# Altium PCB Seguidordelinea.PcbDoc
Units mm, origin at the board's own origin, x right, y up, seen from the top; angles counter-clockwise.
Board outline 150 x 60 mm, 2 copper layers (Top Layer, Bottom Layer); 38 components, 51 nets, 177 pads, 10 vias.
Unrouted connection lines stored in the file: 8.
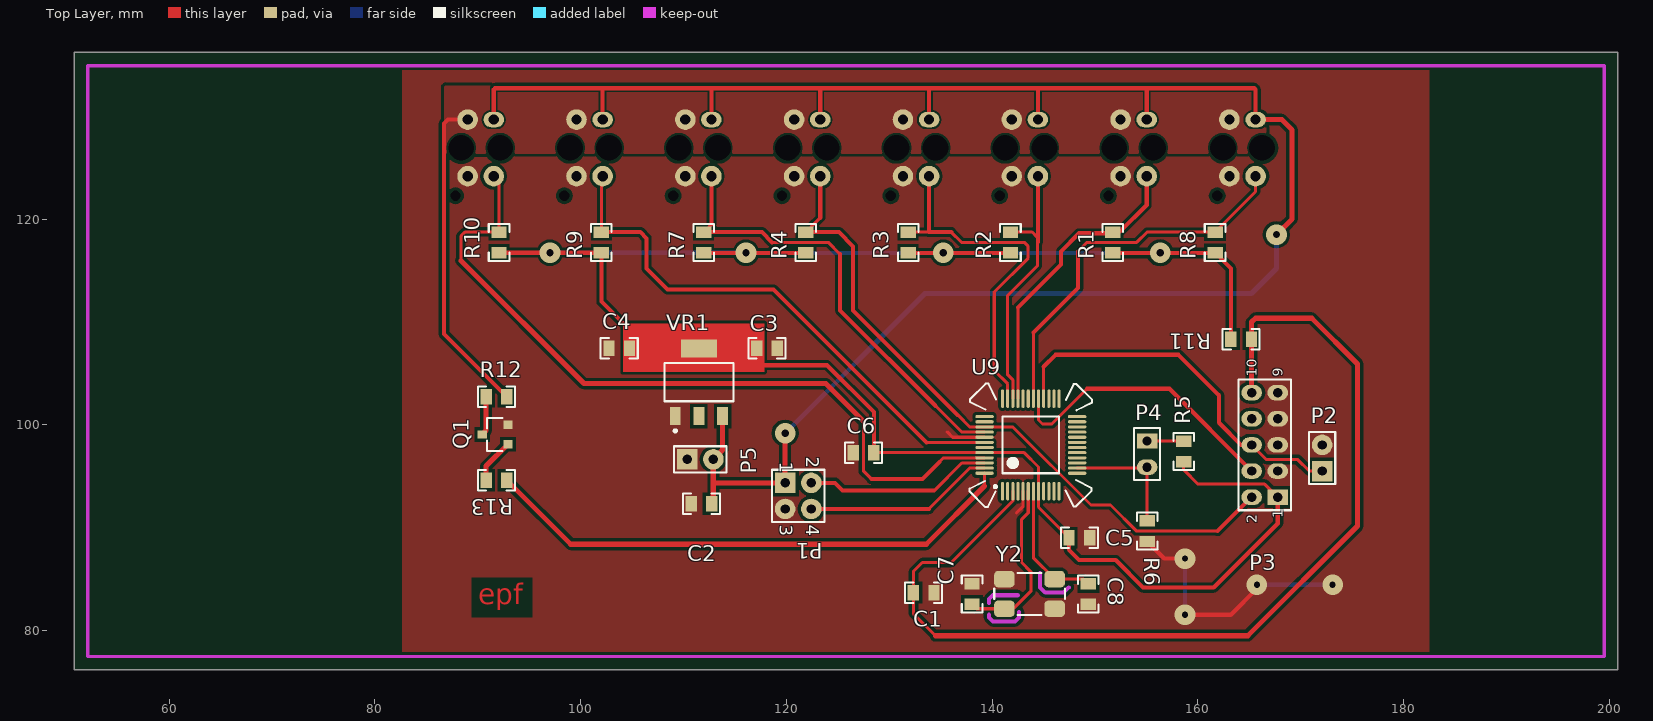
[diagram p0: Top Layer view]
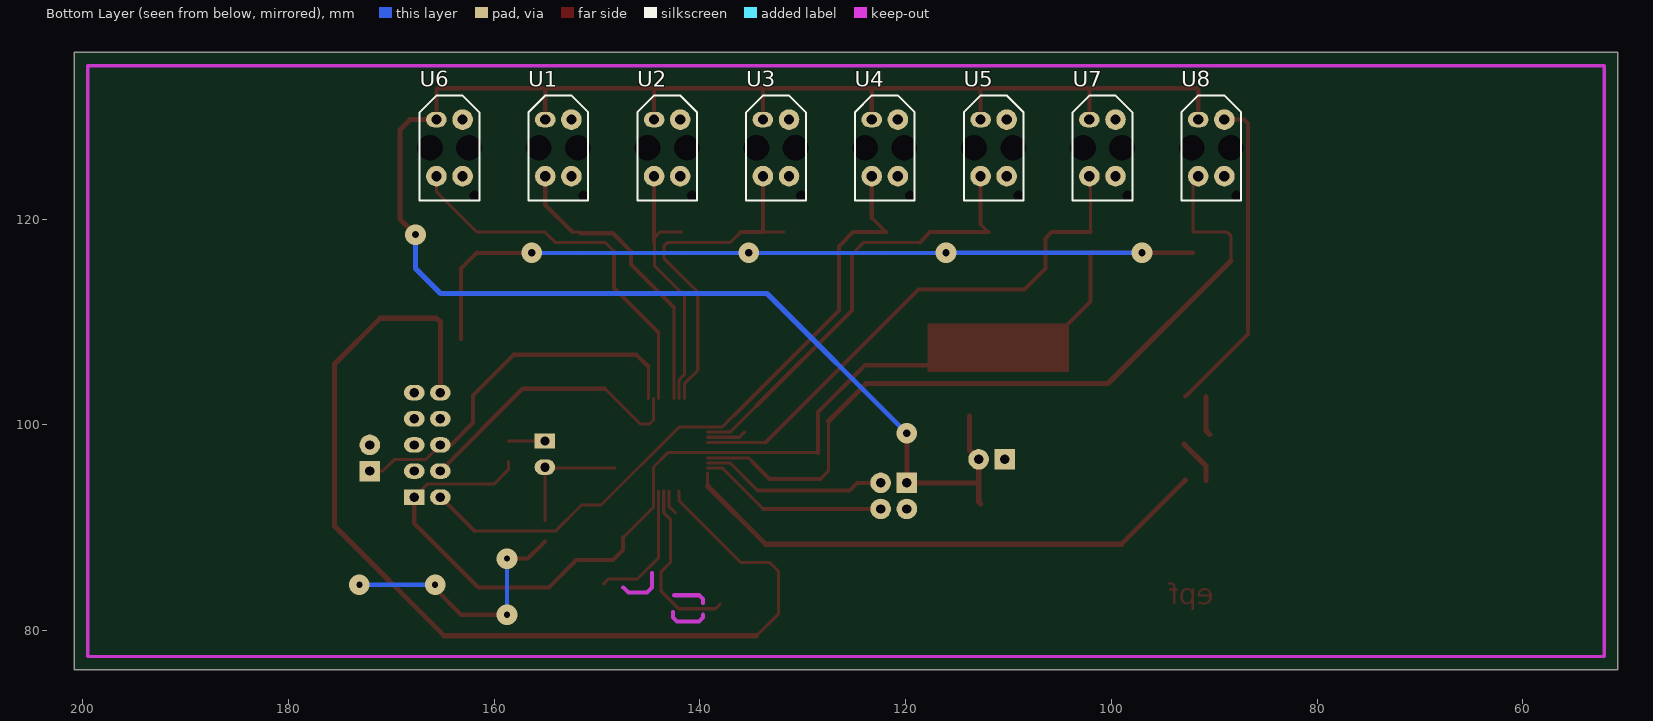
[diagram p1: Bottom Layer view, seen from below]

## Layer stack, top to bottom
Top Layer: signal copper 0.0356
Dielectric: dielectric 0.32, FR-4, Dk 4.8
Bottom Layer: signal copper 0.0356

## Board outline
50.8,76.2 200.8,76.2 200.8,136.2 50.8,136.2

## Design rules (kind name [scope] priority, off if disabled: settings)
Clearance Clearance_1 [InNamedPolygon('TOPGND')] p1: gap=0.3
Clearance [All] p2: gap=0.2
PolygonConnect [All] p1: connectstyle=Direct reliefconductorwidth=0.254 reliefentries=4 polygonreliefangle="90 Angle"
RoutingVias [All] p1: holewidth=0.6 width=2 viastyle="Through Hole" minholewidth=0.6 minwidth=1.27 maxholewidth=3 maxwidth=3
SilkscreenOverComponentPads [All] p1: minsilkscreentomaskgap=0.254
SolderMaskExpansion [All] p1: expansion=0.102
Width [All] p1: maxlimit=2 minlimit=0.3 preferedwidth=0.5
27 further rules are at their usual default settings.

## Components (designator, comment, footprint, x,y, rotation, side; value= is the part's Value field where it differs from the comment)
C1 "Capacitor" 0805_CAP 133.35,83.693 r180 top
C2 "Capacitor" 0805_CAP 111.744,92.329 r0 top
C3 "Capacitor" 0805_CAP 118.11,107.442 r180 top
C4 "Capacitor" 0805_CAP 103.759,107.442 r0 top
C5 "Capacitor" 0805_CAP 148.479,89.027 r180 top
C6 "Capacitor" 0805_CAP 127.508,97.282 r0 top
C7 "Capacitor" 0805_CAP 138.049,83.566 r270 top
C8 "Capacitor" 0805_CAP 149.352,83.55 r270 top
P1 "Header 2X2" HDR2X2 119.888,94.361 r270 top
P2 "Header 2" HDR1X2#1 172.085,95.504 r90 top
P3 "Header 5X2" HDR2X5 167.767,92.964 r90 top
P4 "Header 2" HDR1X2#2 155.067,98.425 r270 top
P5 "Header 2" HDR1X2#1 110.363,96.647 r0 top
Q1 "BC847B" SOT23 91.694,99.06 r90 top
R1 "Resistor" 0805_RES 151.729,117.729 r90 top
R2 "Resistor" 0805_RES 141.786,117.729 r90 top
R3 "Resistor" 0805_RES 131.844,117.729 r90 top
R4 "Resistor" 0805_RES 121.902,117.729 r90 top
R5 "Resistor" 0805_RES 158.623,97.409 r90 top
R6 "Resistor" 0805_RES 155.067,89.662 r270 top
R7 "Resistor" 0805_RES 111.96,117.729 r90 top
R8 "Resistor" 0805_RES 161.671,117.729 r90 top
R9 "Resistor" 0805_RES 102.017,117.729 r90 top
R10 "Resistor" 0805_RES 92.075,117.729 r90 top
R11 "Resistor" 0805_RES 164.211,108.331 r180 top
R12 "Resistor" 0805_RES 91.821,102.743 r0 top
R13 "Resistor" 0805_RES 91.821,94.615 r180 top
U1 "TCRT5000" TCRT5000 153.761,126.917 r90 bottom
U2 "TCRT5000" TCRT5000 143.183,126.917 r90 bottom
U3 "TCRT5000" TCRT5000 132.606,126.917 r90 bottom
U4 "TCRT5000" TCRT5000 122.029,126.917 r90 bottom
U5 "TCRT5000" TCRT5000 111.452,126.917 r90 bottom
U6 "TCRT5000" TCRT5000 164.338,126.917 r90 bottom
U7 "TCRT5000" TCRT5000 100.874,126.917 r90 bottom
U8 "TCRT5000" TCRT5000 90.297,126.917 r90 bottom
U9 "LPC1313FBD48/01" TQFP48_LPC1343 143.764,98.044 r0 top
VR1 "AMS1117" "SOT-223 - M3" 111.506,104.138 r0 top
Y2 "SX6035" SX6035 143.637,83.566 r0 top

## Footprints (in the part's own frame and the unit in brackets; to place one, negate y for a bottom-side part, rotate by r counter-clockwise, add the part's x,y. Pads: shape width x height; smd on the part's side, far side on the other; paste and mask are expansions set on the pad)
0805_CAP [mm]
  rect 1.1x1.5 smd: 1(-1,0) 2(1,0)
  silkscreen extent -1.8,-1 1.8,1, body extent -1,-0.62 1,0.63, height 0.78
0805_RES [mm]
  rect 1.1x1.5 smd: 1(-1,0) 2(1,0)
  silkscreen extent -1.8,-1 1.8,1, body extent -1,-0.62 1,0.63, height 0.78
HDR1X2#1 [mm] "Connector; Header; 2 Position"
  rect 2x2 hole 0.9: 1(0,0)
  round 2 hole 0.9: 2(2.54,0)
  silkscreen extent -1.27,-1.27 3.81,1.27
HDR1X2#2 [mm] "Connector; Header; 2 Position"
  rect 1.5x2 hole 0.9: 1(0,0)
  oval 1.5x2 hole 0.9: 2(2.54,0)
  silkscreen extent -1.27,-1.27 3.81,1.27
HDR2X2 [mm] "Connector; Header; 2x2 Position"
  rect 2x2 hole 0.9: 1(0,0)
  round 2 hole 0.9: 2(0,2.54) 3(2.54,0) 4(2.54,2.54)
  silkscreen extent -1.27,-1.27 3.81,3.81
HDR2X5 [mm] "Connector; Header; 5x2 Position"
  rect 1.5x2 hole 0.9: 1(0,0)
  oval 1.5x2 hole 0.9: 2(0,2.54) 3(2.54,0) 4(2.54,2.54) 5(5.08,0) 6(5.08,2.54) 7(7.62,0) 8(7.62,2.54) 9(10.16,0) 10(10.16,2.54)
  silkscreen extent -1.27,-1.27 11.43,3.81, body extent -1.27,-1.27 11.41,3.81, height 8.55
SOT23 [mm]
  rect 0.8x0.9 smd: 1(-0.95,-1.25) 2(0.95,-1.25) 3(0,1.25)
  silkscreen extent -1.6,-0.7 1.6,0.8, body extent -1.5,-1.25 1.5,1.25, height 1.05
"SOT-223 - M3" [mm] "SOT-223/SC-73; 4 Leads; Body 6.7 x 7.3 mm, inc. leads (LxW max)"
  rect 1.05x1.75 smd: 1(-2.3,-3.3) 2(0,-3.3) 3(2.3,-3.3)
  rect 3.5x1.75 smd: 2(0,3.3)
  silkscreen extent -3.35,-4.85 3.35,1.85, body extent -3.32,-3.67 3.38,3.53, height 1.85
SX6035 [mm]
  rrect50% 2x1.6 smd: 1(-2.44,-1.441) 2(2.441,-1.441) 3(2.441,1.441) 4(-2.44,1.441)
  silkscreen extent -3.43,-2.03 3.43,2.03, body extent -3,-1.75 3,1.75, height 1.05
TCRT5000 [mm]
  round 0 hole 1: 0(-4.65,-2.45)
  round 2 hole 2.5: 0(0,-1.9) 0(0,1.9)
  oval 1.5x2 hole 1: 1(2.75,1.27)
  round 2 hole 1: 2(-2.75,1.27) 3(-2.75,-1.27) 4(2.75,-1.27)
  silkscreen extent -5.1,-2.9 5.1,2.9
TQFP48_LPC1343 [mm] "48-Pin Thin Quad Flat Pack 0.5 mm Pitch, IPC Medium Density"
  oval 0.3x1.8 smd: 1(-2.75,-4.5) 2(-2.25,-4.5) 3(-1.75,-4.5) 4(-1.25,-4.5) 5(-0.75,-4.5) 6(-0.25,-4.5) 7(0.25,-4.5) 8(0.75,-4.5) 9(1.25,-4.5) 10(1.75,-4.5) 11(2.25,-4.5) 12(2.75,-4.5) 25(2.75,4.5) 26(2.25,4.5) 27(1.75,4.5) 28(1.25,4.5) 29(0.75,4.5) 30(0.25,4.5) 31(-0.25,4.5) 32(-0.75,4.5) 33(-1.25,4.5) 34(-1.75,4.5) 35(-2.25,4.5) 36(-2.75,4.5)
  oval 1.8x0.3 smd: 13(4.5,-2.75) 14(4.5,-2.25) 15(4.5,-1.75) 16(4.5,-1.25) 17(4.5,-0.75) 18(4.5,-0.25) 19(4.5,0.25) 20(4.5,0.75) 21(4.5,1.25) 22(4.5,1.75) 23(4.5,2.25) 24(4.5,2.75) 37(-4.5,2.75) 38(-4.5,2.25) 39(-4.5,1.75) 40(-4.5,1.25) 41(-4.5,0.75) 42(-4.5,0.25) 43(-4.5,-0.25) 44(-4.5,-0.75) 45(-4.5,-1.25) 46(-4.5,-1.75) 47(-4.5,-2.25) 48(-4.5,-2.75)
  silkscreen extent -5.96,-6.04 5.96,5.96, body extent -4.5,-4.5 4.5,4.5, height 1.64

## Part data
C1 C2 C3 C4 C5 C6 C7 C8: library part Cap
P1: "Header, 2-Pin, Dual row"
P2 P4 P5: "Header, 2-Pin"
P3: "Header, 5-Pin, Dual row"
Q1: "NPN 100MHz"
R1 R2 R3 R4 R5 R6 R7 R8 R9 R10 R11 R12 R13: library part Res
U9: "ARM CortexM3 32K Flash, 8k RAM"
VR1: "Voltage Regulator"
Y2: library part XTAL_SX6035

## Via types
v1: diameter 2, hole 0.711, Top Layer to Bottom Layer, 6 vias
v2: diameter 2, hole 0.6, Top Layer to Bottom Layer, 4 vias

## Nets (pads, with @x,y where several pads share a name; then routed paths per layer and width w, separated by ;. In a path a pad name is that pad's centre, name@x,y a point inside that pad or via, vN(x,y) a via of type N, cw(c..) or ccw(c..) an arc to the next point about the centre after c; other vN are vias at no path point)
3V3: C3.2 C4.2 C5.2 C6.2 P3.1 R1.1 R2.1 R3.1 R4.1 R5.1 R7.1 R8.1 R9.1 R10.1 R11.2 U9.8 U9.44 VR1.2 | length 197.7
  Top Layer w0.3: C6.2 128.52,97.294 U9.44 143.117,97.294 144.514,95.897 U9.8 144.514,91.992 C5.2 ; R5.1 158.623,95.631 160.02,94.234 166.497,94.234 P3.1
  Top Layer w0.4: R10.1 v1(97.028,116.729) R9.1 102.017,111.978 104.648,109.347 ; R7.1 111.976,116.713 v1(116.078,116.713) 121.886,116.713 R4.1 ; 117.094,105.791 123.952,105.791 128.508,101.235 C6.2 ; R3.1 131.86,116.713 v1(135.255,116.713) 141.77,116.713 R2.1 ; C5.2 147.479,87.852 148.463,86.868 152.019,86.868 154.686,84.201 161.544,84.201 167.767,90.424 P3.1 ; R1.1 151.745,116.713 v1(156.337,116.713) 161.655,116.713 R8.1 163.211,115.189 R11.2
  Bottom Layer w0.4: v1(97.028,116.729) 116.062,116.729 v1(116.078,116.713) v1(135.255,116.713) v1(156.337,116.713)
\RESET: C1.2 P3.10 R11.1 U9.3 | length 100.9
  Top Layer w0.3: 134.493,79.502 132.35,81.645 C1.2 132.35,85.741 133.223,86.614 136.041,86.614 142.014,92.587 U9.3
  Top Layer w0.5: 134.493,79.502 164.846,79.502 175.514,90.17 175.514,105.918 171.069,110.363 165.608,110.363 165.227,109.982 P3.10
GND: C1.1 C2.1 C3.1 C4.1 C5.1 C6.1 C7.1 C8.2 P1.3 P2.2 P3.3 P3.5 P3.7 P3.9 P5.1 Q1.2 R6.2 U1.3 U2.3 U3.3 U4.3 U5.3 U6.3 U7.3 U8.3 U9.5 U9.41 VR1.1 Y2.2 Y2.4 | length 31.8
  Top Layer w0.3: 135.636,99.314 136.156,98.794 U9.41 ; 142.367,91.44 143.014,92.087 U9.5
  Top Layer w0.4: R6.2 156.734,86.995 v2(158.75,86.995) ; v2(158.75,81.534) 163.195,81.534 165.735,84.074 v2(165.735,84.455)
  Bottom Layer w0.4: v2(158.75,81.534) v2(158.75,86.995) ; v2(165.735,84.455) v2(173.101,84.455)
LEDON: R12.2 U1.4 U2.4 U3.4 U4.4 U5.4 U6.4 U7.4 U8.4 | length 31.5
  Top Layer w0.4: U8.4 87.122,129.667 86.741,129.286 86.741,108.823 R12.2
LPC13_RXD: P1.2 U9.46 | length 18.3
  Top Layer w0.3: 134.366,93.599 137.061,96.294 U9.46
  Top Layer w0.4: P1.2 124.714,94.361 125.476,93.599 134.366,93.599
LPC13_TXD: P1.4 U9.47 | length 18.5
  Top Layer w0.3: 133.858,91.821 137.831,95.794 U9.47
  Top Layer w0.4: P1.4 133.858,91.821
NetP4_1: P4.1 R5.2 | length 3.6
  Top Layer w0.3: P4.1 155.083,98.409 R5.2
NetQ1_1: Q1.1 R13.2 | length 4.4
  Top Layer w0.5: R13.2 90.821,95.987 Q1.1
NetQ1_3: Q1.3 R12.1 | length 3.8
  Top Layer w0.5: Q1.3 90.821,99.437 R12.1
PIO0_1: U9.4
PIO0_2: U9.10
PIO0_3: P4.2 R6.1 U9.14 | length 12.1
  Top Layer w0.3: U9.14 154.976,95.794 P4.2 R6.1
PIO0_4: U9.15
PIO0_5: U9.16
PIO0_6: U9.22
PIO0_7: U9.23
PIO0_8: U9.27
PIO0_9: P2.1 P3.6 U9.28 | length 36.9
  Top Layer w0.3: U9.28 145.014,105.644 ; 164.211,98.044 P3.6 166.624,96.647 169.672,96.647 170.815,95.504 P2.1
  Top Layer w0.4: 145.014,105.644 146.177,106.807 158.115,106.807 162.052,102.87 162.052,100.203 164.211,98.044
PIO0_10: P3.4 U9.29 | length 27.7
  Top Layer w0.3: U9.29 144.514,100.469 144.907,100.076 145.796,100.076 149.225,103.505
  Top Layer w0.4: 149.225,103.505 157.226,103.505 P3.4
PIO0_11: U9.32
PIO1_0: R1.2 U1.2 U9.33 | length 29
  Top Layer w0.3: U9.33 142.514,111.399 ; R1.2@151.618,118.618 R1.2 R1.2@152.384,118.729
  Top Layer w0.4: 142.514,111.399 146.685,115.57 146.685,116.84 148.463,118.618 R1.2@151.618,118.618 ; R1.2@152.384,118.729 155.031,121.376 U1.2
PIO1_1: R2.2 U2.2 U9.34 | length 26.4
  Top Layer w0.3: R2.2 141.802,118.745 143.891,118.745 144.399,118.237 144.399,117.729 ; U9.34 142.014,104.366 141.478,104.902 141.478,112.522 144.399,115.443 144.399,117.729 ; 144.453,117.783 144.399,117.729
  Top Layer w0.4: 144.453,117.783 U2.2
PIO1_2: R3.2 U3.2 U9.35 | length 34.4
  Top Layer w0.3: R3.2 133.858,118.729 133.876,118.747 ; 136.033,118.729 137.033,117.729 143.129,117.729 143.51,117.348 143.51,116.205 140.208,112.903 140.208,105.283 141.514,103.977 U9.35
  Top Layer w0.4: 133.858,118.729 136.033,118.729 ; 133.876,118.747 U3.2
PIO1_3: P3.2 R4.2 U4.2 U9.39 | length 66.4
  Top Layer w0.3: R4.2 123.299,120.126 ; 136.652,100.965 137.823,99.794 U9.39 142.014,99.794 149.606,92.202 151.511,92.202 154.051,89.662 161.925,89.662
  Top Layer w0.4: R4.2 125.111,118.729 126.492,117.348 126.492,111.125 136.652,100.965 ; 123.299,120.126 U4.2 ; 161.925,89.662 P3.2
PIO1_4: R7.2 U5.2 U9.40 | length 44.3
  Top Layer w0.3: R7.2 112.722,119.491 ; 118.618,117.729 124.079,117.729 125.222,116.586 ; 134.493,101.854 137.053,99.294 U9.40
  Top Layer w0.4: R7.2 117.618,118.729 118.618,117.729 ; 112.722,119.491 U5.2 ; 125.222,116.586 125.222,111.125 134.493,101.854
PIO1_5: R10.2 U8.2 U9.45 | length 75.2
  Top Layer w0.3: 88.392,115.951 88.392,118.364 88.757,118.729 R10.2 92.075,123.659 U8.2 ; 127.481,100.357 127.481,95.531 128.27,94.742 ; 134.874,96.393 135.275,96.794 U9.45
  Top Layer w0.4: 128.27,94.742 133.223,94.742 134.874,96.393
  Top Layer w0.5: 88.392,115.951 100.33,104.013 123.825,104.013 127.481,100.357
PIO1_8: U9.9
PIO1_9: U9.17
PIO1_10: R8.2 U6.2 U9.30 | length 37.3
  Top Layer w0.3: U9.30 144.014,108.962 ; 148.336,116.84 149.225,117.729 154.051,117.729 155.051,118.729 R8.2 165.608,122.666 U6.2
  Top Layer w0.4: 144.014,108.962 148.336,113.284 148.336,116.84
PIO1_11: R9.2 U7.2 U9.42 | length 52.9
  Top Layer w0.3: R9.2 102.017,124.04 U7.2 ; 133.608,98.294 U9.42
  Top Layer w0.4: R9.2 105.807,118.729 106.426,118.11 106.426,115.189 108.458,113.157 118.745,113.157 133.608,98.294
PIO2_0: U9.2
PIO2_1: U9.13
PIO2_2: U9.26
PIO2_3: U9.38
PIO2_4: U9.19
PIO2_5: U9.20
PIO2_6: U9.1
PIO2_7: U9.11
PIO2_8: U9.12
PIO2_9: U9.24
PIO2_10: U9.25
PIO2_11: U9.31
PIO3_0: U9.36
PIO3_1: U9.37
PIO3_2: U9.43
PIO3_3: R13.1 U9.48 | length 52.6
  Top Layer w0.3: 139.264,94.052 U9.48
  Top Layer w0.5: R13.1 99.044,88.392 133.604,88.392 139.264,94.052
PIO3_4: U9.18
PIO3_5: U9.21
VCC: C2.2 P1.1 P5.2 U1.1 U2.1 U3.1 U4.1 U5.1 U6.1 U7.1 U8.1 VR1.3 | length 191.6
  Top Layer w0.4: U8.1 91.567,132.588 91.694,132.715 102.235,132.715 ; U7.1 102.144,132.624 102.235,132.715 ; U5.1 112.722,132.661 112.776,132.715 ; U4.1 123.299,132.697 123.317,132.715 ; U3.1 133.876,132.697 133.858,132.715 ; U2.1 144.453,132.642 144.526,132.715 ; U1.1 155.031,132.679 155.067,132.715 ; U6.1 165.608,132.588 165.481,132.715 155.067,132.715 ; 102.235,132.715 112.776,132.715 ; 112.776,132.715 123.317,132.715 ; 123.317,132.715 133.858,132.715 ; 133.858,132.715 144.526,132.715 ; 144.526,132.715 155.067,132.715
  Top Layer w0.5: C2.2 112.903,92.488 112.903,94.361 ; VR1.3 113.806,97.55 P5.2 112.903,94.361 ; v1(119.888,99.187) P1.1 112.903,94.361 ; U6.1 168.148,129.667 169.164,128.651 169.164,120.015 v1(167.64,118.491)
  Bottom Layer w0.5: v1(119.888,99.187) 133.477,112.776 165.227,112.776 167.64,115.189 v1(167.64,118.491)
XTALIN: C7.2 U9.6 Y2.1 | length 17
  Top Layer w0.3: C7.2 138.489,82.125 Y2.1 142.069,82.125 143.764,83.82 143.764,85.725 142.875,86.614 142.875,90.805 143.514,91.444 U9.6
XTALOUT: C8.1 U9.7 Y2.3 | length 12.9
  Top Layer w0.3: U9.7 144.014,87.07 Y2.3 148.896,85.007 C8.1
pads on no net: P3.8 U1.0 U2.0 U3.0 U4.0 U5.0 U6.0 U7.0 U8.0

## Polygon pours and split planes (outlines as drawn)
GND on Top Layer "TOPGND" (solid, remove dead copper, pour order 4): 82.677,134.747 82.677,77.597 82.804,77.47 82.931,77.343 182.499,77.343 182.499,134.9
LEDON on Top Layer "TOPLED" (solid, remove dead copper, pour order 2): 86.868,132.969 86.741,132.842 86.741,126.365 165.862,126.365 166.497,125.73 166.624,125.857 166.624,132.842

## Keep-outs
Keep-Out Layer:
  lines w0.3: 52.1,77.5 52.1,134.9 199.5,134.9 199.5,77.5 52.1,77.5
  lines w0.4: 139.7,81.534 139.7,81.28 140.081,80.899 142.24,80.899 142.621,81.28 142.621,81.788 ; 139.7,82.677 139.7,83.058 140.081,83.439 142.494,83.439 ; 144.653,85.598 144.653,84.201 145.161,83.693 146.939,83.693 147.447,84.201

## Other copper
Top Layer:
  rectangle net 3V3: 104.14,105.156 117.856,109.855
  text "epf" at 90.043,82.55 h2

## Dimensions
52.1,77.5 to 52.1,134.9 on Mechanical 1
52.1,77.5 to 199.5,77.5 on Mechanical 1

## Text inside footprints (layer, text, board x,y; h text height)
P1: Top Overlay "1" at 119.38,96.393 h1.27 r270; Top Overlay "2" at 121.92,96.901 h1.27 r270; Top Overlay "4" at 121.92,90.297 h1.27 r270; Top Overlay "3" at 119.38,90.297 h1.27 r270
P3: Top Overlay "10" at 165.735,104.648 h1 r90; Top Overlay "9" at 168.275,104.648 h1 r90; Top Overlay "1" at 168.275,90.932 h1 r90; Top Overlay "2" at 165.735,90.424 h1 r90